# Altium PCB NetTroll.PcbDoc (part 2 of 2)
Units mm, origin at the board's own origin, x right, y up, seen from the top; angles counter-clockwise.
Board outline 65 x 60 mm, 2 copper layers (Top Layer, Bottom Layer); 90 components, 102 nets, 423 pads, 380 vias.
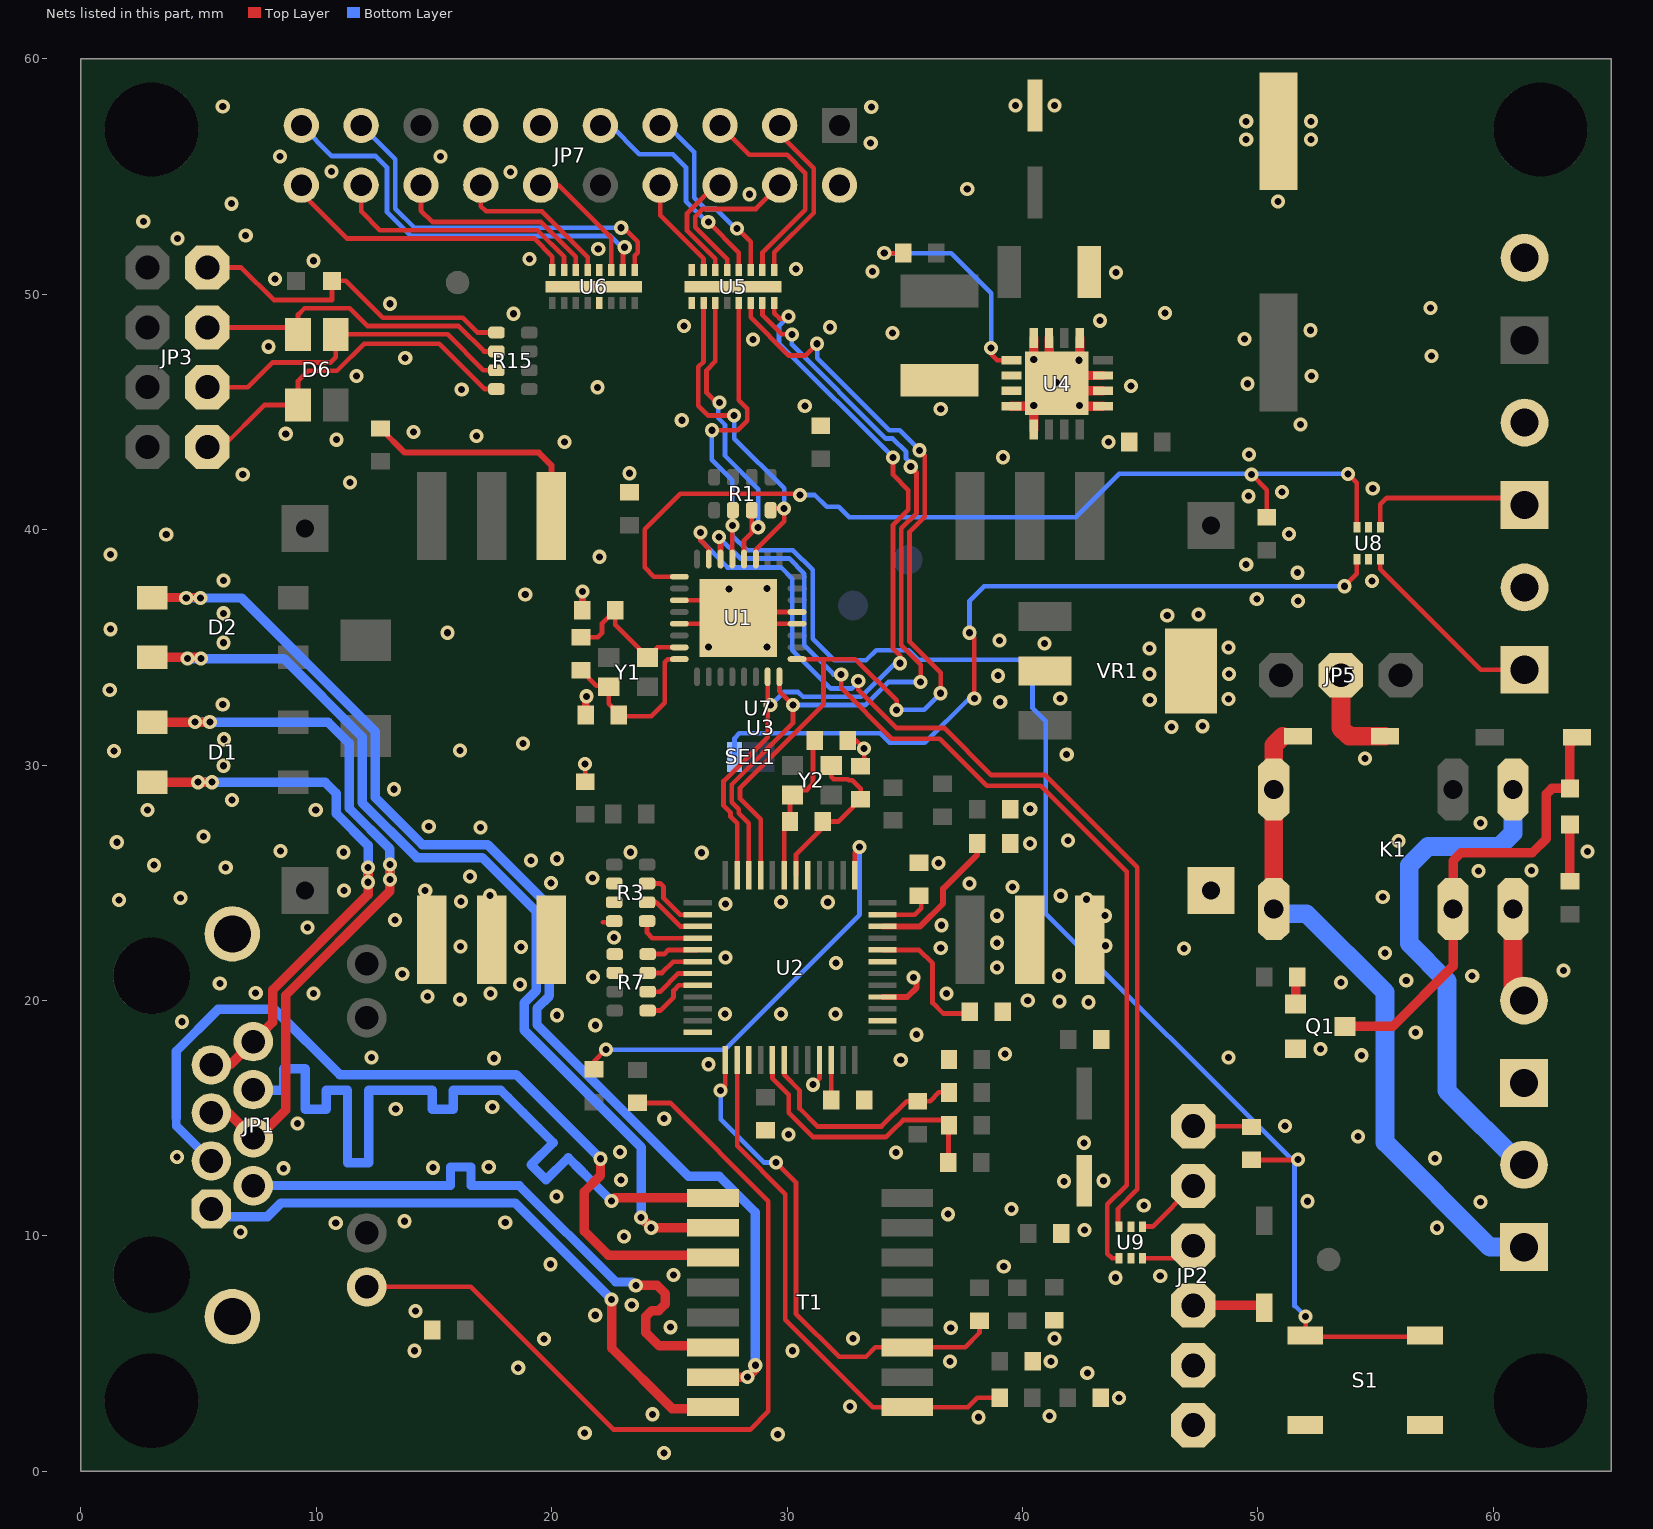
[diagram p2: the nets of this part, all layers, seen from the top]

## Via types
v1: diameter 0.6, hole 0.3, Top Layer to Bottom Layer, tented both sides, 380 vias

## Nets (pads, with @x,y where several pads share a name; then routed paths per layer and width w, separated by ;. In a path a pad name is that pad's centre, name@x,y a point inside that pad or via, vN(x,y) a via of type N, cw(c..) or ccw(c..) an arc to the next point about the centre after c; other vN are vias at no path point) (continued)
EP_LED_2: JP1.12 R14.1 | length 36.1
  Top Layer w0.2: JP1.12@12.14,7.84 16.56,7.84 22.625,1.775 28.425,1.775 29.203,2.553 29.203,11.472 25.025,15.65 R14.1@23.65,15.65
EP_PWR_A: D1.AC2 JP1.4 JP1.5 | length 32.2
  Top Layer w0.4: D1.AC2@3.025,31.82 v1@5.47,31.82 ; JP1.5@5.54,15.225 6.27,15.225 JP1.4@7.32,14.175 7.525,14.175 8.7,15.35 8.7,20.225 13.125,24.65 v1(13.125,25.15) v1(13.125,25.775)
  Bottom Layer w0.4: v1(4.85,31.825) v1(5.475,31.825) 10.5,31.825 11.4,30.925 11.4,28.169 13.125,26.444 v1(13.125,25.775) v1(13.125,25.15)
EP_PWR_B: D1.AC1 JP1.7 JP1.8 | length 24.6
  Top Layer w0.4: D1.AC1@3.025,29.28 v1@5.57,29.28 ; JP1.7@5.54,17.265 6.33,17.265 JP1.8@7.32,18.255 8.15,19.085 8.15,19.625 8.15,20.453 12.2,24.503 v1(12.2,25.025) v1(12.2,25.65)
  Bottom Layer w0.4: v1(4.975,29.275) v1(5.575,29.275) 10.375,29.275 10.85,28.8 10.85,27.942 12.2,26.592 v1(12.2,25.65) v1(12.2,25.025)
EP_RX_N: JP1.6 T1.9 | length 36
  Top Layer w0.4: v1(22.546,11.479) 22.687,11.62 T1.9@26.848,11.62
  Bottom Layer w0.4: JP1.6@7.32,16.215 7.32,16.19 8.175,16.19 8.625,16.19 8.625,17.11 9.525,17.11 9.525,16.19 9.525,15.39 10.425,15.39 10.425,16.19 11.325,16.19 11.325,13.112 12.225,13.112 12.225,16.19 13.125,16.19 14.025,16.19 14.925,16.19 14.925,15.39 15.825,15.39 15.825,16.19 16.725,16.19 17.625,16.19 17.835,16.19 18.153,15.872 18.79,15.235 19.426,14.599 20.062,13.963 19.122,13.022 19.758,12.385 20.699,13.326 21.263,12.763 21.381,12.644 ; 21.763,12.263 21.381,12.644 ; v1(22.546,11.479) 21.381,12.644
EP_RX_P: JP1.3 T1.11 | length 36
  Top Layer w0.4: v1(22.071,13.279) 22.071,12.566 21.38,11.875 21.38,10.208 22.408,9.18 26.748,9.18 T1.11@26.848,9.08
  Bottom Layer w0.381: 4.05,15 4.05,14.675 JP1.3@5.54,13.185
  Bottom Layer w0.4: 4.05,15 4.05,17.85 5.825,19.625 8.225,19.625 11,16.85 18.5,16.85 v1(22.071,13.279)
EP_RX_PWR: D2.AC2 T1.15 | length 51.6
  Top Layer w0.4: D2.AC2@3.025,37.12 v1@5.055,37.12 ; T1.15@26.848,4 v1@28.314,4 ; v1(28.318,4.004) v1@28.314,4 ; v1(28.647,4.509) 28.647,4.333 v1@28.314,4
  Bottom Layer w0.4: v1(4.475,37.1) v1(5.075,37.1) 6.825,37.1 12.5,31.425 12.5,28.625 14.5,26.625 17.272,26.625 19.9,23.997 19.9,20.197 19.375,19.672 19.375,18.975 25.809,12.541 27.116,12.541 28.647,11.01 28.647,4.333 v1(28.318,4.004) v1@28.305,4.017
EP_TX_N: JP1.2 T1.14 | length 26.3
  Top Layer w0.4: v1(23.571,7.904) 24.471,7.904 24.821,7.554 24.821,7.104 24.546,6.829 24.246,6.829 23.996,6.579 23.996,5.897 24.564,5.329 26.788,5.329 T1.14@26.848,5.27
  Bottom Layer w0.381: JP1.2@7.32,12.135 12.425,12.135 15.698,12.135 15.698,12.922 16.579,12.922 16.579,12.135 17.46,12.135 17.9,12.135 18.626,12.135 22.713,8.049 23.426,8.049 v1(23.571,7.904)
  Bottom Layer w0.4: JP1.2@7.32,12.135 JP1.2@7.35,12.105
EP_TX_P: JP1.1 T1.16 | length 26.5
  Top Layer w0.4: v1(22.546,7.304) 22.546,5.229 25.11,2.665 26.782,2.665 T1.16@26.848,2.73
  Bottom Layer w0.4: JP1.1@5.54,11.145 5.86,10.825 7.925,10.825 8.5,11.4 18.45,11.4 v1(22.546,7.304)
EP_TX_PWR: D2.AC1 T1.10 | length 42
  Top Layer w0.4: D2.AC1@3.025,34.58 v1@5.045,34.58 ; v1(23.796,10.779) v1(24.225,10.35) T1.10@26.848,10.35
  Bottom Layer w0.4: v1(4.525,34.525) v1(5.1,34.525) 8.622,34.525 11.95,31.197 11.95,28.397 14.272,26.075 17.044,26.075 19.35,23.769 19.35,20.425 18.825,19.9 18.825,18.747 23.796,13.776 v1(23.796,10.779) v1(24.225,10.35)
EXT_INT_SEL: SEL1.1 U8.1 | length 34
  Top Layer w0.2: v1@37.75,35.45 v1(37.75,35.625) 37.95,35.425 v1(37.95,32.825) ; v1(53.675,37.6) 54.2,38.125 U8.1@54.2,38.75
  Bottom Layer w0.2: SEL1.1@27.765,30.35 27.765,31.14 27.975,31.35 33.95,31.35 34.35,30.95 35.85,30.95 37.725,32.825 v1(37.95,32.825) ; v1(37.75,35.625) 37.75,36.984 38.366,37.6 v1(53.675,37.6)
F_D16: JP7.4 U5.5 | length 7.6
  Top Layer w0.2: U5.5@27.45,51.025 27.45,51.497 26.1,52.847 26.1,53.303 26.422,53.625 28.675,53.625 JP7.4@29.685,54.635 JP7.4@29.685,55.235
F_D17: JP7.12 U6.3 | length 5.3
  Top Layer w0.2: JP7.12@19.525,54.635 20.297,54.635 22.525,52.407 U6.3@22.525,51.025
F_LED1: JP7.20 U6.8 | length 12.7
  Top Layer w0.2: JP7.20@9.365,54.635 9.365,54.31 11.3,52.375 19.25,52.375 20.025,51.6 U6.8@20.025,51.025
F_LED2: JP7.18 U6.7 | length 11.1
  Top Layer w0.2: JP7.18@11.905,54.635 11.905,53.52 12.7,52.725 19.395,52.725 20.525,51.595 U6.7@20.525,51.025
F_LED3: JP7.16 U6.6 | length 9
  Top Layer w0.2: JP7.16@14.445,54.635 14.445,53.555 14.925,53.075 19.54,53.075 21.025,51.59 U6.6@21.025,51.025
F_LED4: JP7.14 U6.5 | length 6.9
  Top Layer w0.2: JP7.14@16.985,54.635 16.985,53.75 17.21,53.525 19.585,53.525 21.525,51.585 U6.5@21.525,51.025
F_MISO: JP7.5 U5.2 | length 9.3
  Top Layer w0.2: JP7.5@27.145,57.175 28.395,55.925 30,55.925 30.775,55.15 30.775,53.6 28.95,51.775 U5.2@28.95,51.025
F_MOSI: JP7.3 U5.1 | length 8
  Top Layer w0.2: U5.1@29.45,51.025 29.45,51.78 31.125,53.455 31.125,55.35 29.685,56.79 JP7.3@29.685,57.775
F_RST: JP7.9 U5.4 | length 9.7
  Top Layer w0.2: v1(26.65,53.075) 27.95,51.775 U5.4@27.95,51.025
  Bottom Layer w0.2: JP7.9@22.065,57.175 22.5,57.175 23.725,55.95 25.15,55.95 25.7,55.4 25.7,53.955 26.58,53.075 v1(26.65,53.075)
F_SCK: JP7.7 U5.3 | length 8.7
  Top Layer w0.2: v1(27.875,52.8) 28.45,52.225 U5.3@28.45,51.025
  Bottom Layer w0.2: JP7.7@24.605,57.775 24.605,57.49 26.05,56.045 26.05,54.1 26.525,53.625 26.975,53.625 27.8,52.8 v1(27.875,52.8)
F_SCL: JP7.6 U5.6 | length 4.8
  Top Layer w0.2: U5.6@26.95,51.025 26.95,51.502 25.75,52.702 25.75,53.448 26.937,54.635 JP7.6@27.145,54.635
F_SDA: JP7.8 U5.7 | length 5
  Top Layer w0.2: JP7.8@24.605,55.235 JP7.8@24.605,54.635 24.605,53.352 26.45,51.507 U5.7@26.45,51.025
F_SS_RX: JP7.19 U6.2 | length 18
  Top Layer w0.2: U6.2@23.025,51.025 23.025,51.925 v1(23.1,52)
  Bottom Layer w0.2: JP7.19@9.365,57.175 10.665,55.875 12.525,55.875 13,55.4 13,53.5 14.025,52.475 22.5,52.475 22.975,52 v1(23.1,52)
F_SS_TX: JP7.17 U6.1 | length 16.3
  Top Layer w0.2: v1(22.951,52.828) 23.05,52.828 23.65,52.228 23.65,51.772 23.525,51.647 U6.1@23.525,51.025
  Bottom Layer w0.2: JP7.17@11.905,57.175 13.35,55.73 13.35,53.645 14.17,52.825 22.949,52.825 v1(22.951,52.828)
GND: C1.1 C2.1 C3.1 C4.1 C5.1 C6.1 C7.1 C8.1 C9.- C10.1 C11.1 C12.1 C13.1 C16.1 C17.1 C18.1 C19.1 C21.1 C22.2 C23.1 C24.1 C25.- C26.- JP1.GND1 JP1.GND2 JP2.5 JP2.6 JP4.2 JP7.2 JP7.11 JP7.13 JP8.1 JP9.2 JP12.2 Q1.1 R3.2 R3.3 R3.4 R4.1 R5.1 R7.1 R7.2 S1.1 S1.2 U1.3 U1.5 U1.20 U1.21 U1.33 U2.3 U2.9 U2.14 U2.16 U2.19 U2.29 U2.48 U3.7 U3.8 U3.9 U3.11 U3.12 U4.0 U4.1 U4.5 U4.6 U4.7 U4.9 U4.11 U4.12 U4.16 U5.8 U5.9 U5.17 U6.4 U6.13 U6.17 U7.3 U8.2 U8.5 U9.2 U9.5 VR1.2 | length 25.2
  Top Layer w0.2: C2.1@21.292,36.579 C2.1@21.296,36.579 ; C18.1@21.421,29.304 v1(21.421,30.054) ; v1@21.446,32.896 v1(21.475,32.925) ; 22.171,23.329 R3.4@22.471,23.329 ; U1.5@25.421,36.004 U1.33@26.721,36.004 ; U1.3@25.421,37.004 U1.33@27.171,37.004 ; U1.33@29.121,36.004 U1.20@30.421,36.004 ; U1.33@29.121,36.504 U1.21@30.421,36.504 ; v1(31.1,16.425) 31.375,16.7 U2.9@31.375,17.475 ; C12.1@32.571,31.054 32.921,31.054 v1(33.271,30.704) 33.271,30.104 C13.1@33.121,29.954 ; U4.0@40.471,46.404 U4.0@40.471,47.354 ; U4.0@41.121,45.754 U4.0@41.121,47.354 ; U4.0@41.771,45.104 U4.0@42.425,45.104 ; U4.0@41.771,45.754 U4.0@41.775,45.754
  Top Layer w0.25: U2.16@34.05,20.15 35.1,20.15 35.5,20.55 35.5,20.85 v1(35.375,20.975)
  Top Layer w0.3: C2.1@21.296,36.579 21.3,36.583 v1(21.3,37.375) ; C1.1@21.446,32.129 v1@21.446,32.896
  Top Layer w0.4: U4.16@39.525,45.25 40.475,45.25 U4.1@40.475,44.25 ; U4.0@40.475,47.358 U4.12@40.475,48.15 ; U4.0@41.125,47.358 U4.11@41.125,48.15 ; U4.0@41.775,45.9 U4.6@43.425,45.9 ; U4.0@41.775,46.55 U4.7@43.425,46.55 ; U4.0@42.425,45.25 U4.5@43.425,45.25 ; U4.0@42.425,47.2 U4.9@42.425,48.15
  other v1: 24.775,0.775 29.6,1.575 21.4,1.625 38.125,2.3 41.15,2.35 24.275,2.425 32.675,2.75 44.1,3.125 42.75,4.175 18.575,4.4 36.925,4.675 41.2,4.675 14.175,5.125 30.225,5.125 19.675,5.625 32.8,5.65 41.35,5.65 36.95,6.1 25.05,6.125 21.849,6.631 14.214,6.81 23.399,7.07 43.95,8.225 45.85,8.3 25.175,8.35 39.2,8.7 19.95,8.8 23.075,9.975 6.775,10.175 42.625,10.25 57.6,10.35 10.825,10.55 18.025,10.575 13.75,10.625 36.825,10.925 39.525,11.15 45.15,11.3 59.45,11.45 52.1,11.475 20.2,11.675 41.763,12.322 43.44,12.346 22.94,12.372 8.6,12.875 14.95,12.9 17.325,12.925 57.525,13.3 4.075,13.35 34.625,13.55 22.896,13.57 42.616,13.958 54.25,14.225 30.053,14.303 51.15,14.675 9.2,14.775 24.777,14.982 13.375,15.4 17.475,15.475 26.66,17.293 34.825,17.475 17.55,17.55 12.35,17.575 48.75,17.575 54.4,17.675 39.256,17.726 52.65,17.95 35.5,18.55 56.7,18.65 21.85,18.95 4.3,19.1 20.225,19.375 29.731,19.422 32.049,19.422 27.368,19.434 42.796,19.929 41.571,19.954 40.221,20.004 16.1,20.05 14.725,20.175 9.875,20.3 17.4,20.3 36.775,20.3 7.425,20.325 18.646,20.679 5.9,20.725 53.525,20.775 56.3,20.85 21.75,21 59.1,21.05 41.546,21.054 13.65,21.125 62.975,21.275 38.921,21.404 32.076,21.593 27.38,21.829 55.4,22.025 46.852,22.216 36.525,22.225 18.696,22.279 16.121,22.304 43.521,22.329 38.921,22.454 22.65,22.675 9.625,23.1 36.55,23.2 13.35,23.425 38.921,23.604 43.496,23.604 27.383,24.101 29.743,24.183 31.724,24.176 16.146,24.204 1.625,24.275 42.721,24.304 4.225,24.35 55.3,24.4 17.371,24.454 41.621,24.454 11.175,24.675 14.625,24.675 39.571,24.829 37.75,24.975 19.975,25 21.725,25.2 16.525,25.275 59.375,25.5 61.625,25.525 6.15,25.65 3.1,25.75 36.425,25.85 19.125,25.95 20.225,26.025 26.371,26.279 11.15,26.3 23.35,26.3 64,26.325 8.475,26.35 40.313,26.679 1.525,26.725 55.975,26.775 41.925,26.8 5.2,26.975 16.975,27.35 14.775,27.4 59.45,27.55 2.825,28.1 9.975,28.1 40.325,28.13 6.425,28.525 13.3,28.975 6.05,29.975 54.55,30.275 41.875,30.45 1.4,30.6 16.1,30.625 18.775,30.925 6.075,31.1 46.325,31.625 47.646,31.654 6.025,32.575 39.05,32.675 45.405,32.764 41.6,32.825 48.75,32.815 1.225,33.2 38.95,33.8 45.392,33.868 48.763,33.868 45.4,34.95 48.756,34.991 26.65,35.025 29.15,35.025 40.925,35.175 6.05,35.2 39.025,35.3 15.575,35.625 1.25,35.775 46.146,36.354 47.475,36.4 6.05,36.45 51.7,36.975 49.95,37.05 18.875,37.25 27.525,37.475 29.15,37.5 54.85,37.825 6.05,37.85 51.675,38.175 49.5,38.525 22.025,38.85 1.25,38.95 3.625,39.8 51.325,39.825 49.6,41.425 51.025,41.6 54.875,41.75 11.425,42 6.875,42.35 23.3,42.4 39.171,43.079 49.625,43.2 20.55,43.725 43.651,43.719 10.85,43.825 16.8,43.975 8.7,44.075 14.125,44.15 51.8,44.475 25.525,44.65 36.525,45.125 30.75,45.25 40.475,45.275 42.425,45.275 16.175,45.95 21.95,46.05 44.6,46.1 49.55,46.2 41.45,46.25 11.7,46.525 52.275,46.525 42.4,47.2 40.475,47.225 13.775,47.3 57.375,47.375 7.975,47.775 28.55,48.075 49.425,48.1 34.475,48.35 52.225,48.475 31.825,48.6 25.625,48.65 43.296,48.879 18.375,49.175 46.046,49.204 57.325,49.425 13.125,49.6 8.25,50.65 43.975,50.925 33.625,50.975 30.375,51.075 9.875,51.425 19.05,51.5 21.975,51.925 4.1,52.375 7,52.5 2.65,53.1 6.4,53.85 50.85,53.95 28.4,54.25 37.65,54.475 18.25,55.2 10.65,55.225 8.45,55.85 15.275,55.85 33.55,56.425 49.5,56.575 52.25,56.575 49.5,57.35 52.25,57.35 33.575,57.95 6.025,57.975 39.7,58.025 41.35,58.025
INT1/D3: R21.2 U1.1 U8.6 | length 39.5
  Top Layer w0.2: U1.1@25.421,38.004 24.343,38.004 23.95,38.397 23.95,40.025 25.454,41.529 30.496,41.529 v1(30.55,41.475) ; v1(49.725,42.35) 50.375,41.7 R21.2@50.375,40.525 ; v1(53.825,42.375) 54.2,42 U8.6@54.2,40.1
  Bottom Layer w0.2: v1(30.55,41.475) 31.177,41.475 31.677,40.975 32.197,40.975 32.625,40.547 32.625,40.529 42.254,40.529 44.1,42.375 v1(53.825,42.375)
LINK-LED: R13.2 U2.25 | length 18.1
  Top Layer w0.2: R13.2@21.8,17.075 21.8,17.427 v1(22.299,17.926) ; U2.25@32.875,25.325 32.875,26.3
  Bottom Layer w0.2: v1(22.299,17.926) 22.309,17.916 27.341,17.916 33.075,23.65 v1(33.075,26.528)
MISO: U1.16 U2.34 U5.15 | length 35.7
  Top Layer w0.2: U2.34@28.375,25.325 28.375,27.53 27.946,27.959 27.946,28.127 27.65,28.423 27.65,29.178 30.246,31.774 v1@30.246,32.51 ; U5.15@28.95,49.625 28.95,49.125 29.775,48.3 v1(30.2,48.3) ; U1.16@29.671,33.754 29.671,33.148 30.246,32.573 v1@30.246,32.51 ; v1(30.246,32.554) v1@30.246,32.51 ; v1(35.251,42.677) 35.496,42.433 35.496,40.706 34.85,40.06 34.85,35.091 35.671,34.27 v1(35.671,33.529)
  Bottom Layer w0.2: v1(30.2,48.3) 30.2,47.87 34.195,43.875 34.478,43.875 35.05,43.303 35.05,43.02 35.251,42.818 v1(35.251,42.677) ; v1(30.246,32.554) 33.321,32.554 34.296,33.529 v1(35.671,33.529)
MOSI: U1.15 U2.35 U5.16 | length 34.8
  Top Layer w0.2: U2.35@27.875,25.325 27.875,27.525 27.596,27.804 27.596,27.982 27.3,28.278 27.3,29.323 29.171,31.194 U1.15@29.171,33.754 ; v1@29.196,32.554 29.371,32.554 29.367,32.55 v1(29.3,32.55) ; U5.16@29.45,49.625 29.45,49.2 29.675,48.975 30.05,48.975 30.051,48.976 v1(30.051,49.052) ; v1(34.5,43.075) 34.5,42.332 35.146,41.686 35.146,40.851 34.5,40.205 34.5,34.946 34.796,34.65 v1(34.796,34.329)
  Bottom Layer w0.2: v1(29.3,32.55) 29.854,33.104 30.474,33.104 30.674,32.904 33.146,32.904 33.85,33.608 33.88,33.608 34.601,34.329 v1(34.796,34.329) ; v1(30.051,49.052) 29.65,48.651 29.65,47.925 v1(34.5,43.075)
NetC1_2: C1.2 R2.1 U1.8 Y1.1 | length 7.4
  Top Layer w0.2: R2.1@21.246,34.029 21.896,33.379 22.371,33.379 Y1.1@22.421,33.329 22.421,32.604 22.946,32.079 24.221,32.079 24.796,32.654 24.796,34.377 24.923,34.504 U1.8@25.421,34.504
NetC2_2: C2.2 R2.2 U1.7 Y1.3 | length 6.3
  Top Layer w0.2: R2.2@21.246,35.429 21.964,35.429 22.132,35.597 22.132,36.015 C2.2@22.696,36.579 22.696,35.954 Y1.3@24.071,34.579 24.496,35.004 U1.7@25.421,35.004
NetC10_2: C10.2 U2.20 | length 5.8
  Top Layer w0.2: U2.20@34.05,22.15 35.6,22.15 36.175,21.575 36.175,19.9 36.625,19.45 C10.2@37.75,19.45
NetC11_2: C11.2 U2.22 | length 6.1
  Top Layer w0.254: U2.22@34.05,23.15 35.65,23.15 36.625,24.125 36.625,24.75 38.075,26.2 C11.2@38.075,26.675
NetC20_1: C20.1 JP2.1 | length 2.5
  Top Layer w0.2: JP2.1@47.251,14.664 49.586,14.664 C20.1@49.721,14.529
NetD3_1: D3.1 R22.1 | length 2.4
  Top Layer w0.4: R22.1@63.25,25.075 D3.1@63.25,27.488
NetD3_2: D3.2 D9.A K1.9 Q1.3 | length 19.8
  Top Layer w0.4: Q1.3@53.7,18.9 55.725,18.9 58.29,21.465 K1.9@58.29,23.885 58.29,25.94 58.625,26.275 61.65,26.275 62.25,26.875 62.25,28.774 62.488,29.012 D3.2@63.25,29.012 63.25,30.875 D9.A@63.55,31.175
NetD4_1: D4.A JP2.4 | length 3
  Top Layer w0.4: JP2.4@47.261,7.054 D4.A@50.275,7.054
NetD7_1: D7.A JP5.2 | length 4.3
  Top Layer w0.8: JP5.2@53.52,33.82 53.525,31.575 53.875,31.225 D7.A@55.4,31.225
NetD7_2: D7.K JP6.1 K1.5 K1.6 | length 27.8
  Top Layer w0.8: K1.6@50.67,23.885 K1.5@50.67,28.965 50.67,30.845 51.05,31.225
  Bottom Layer w0.8: K1.6@50.67,23.885 50.866,23.689 52.061,23.689 55.4,20.35 55.4,13.975 59.85,9.525 JP6.1@61.3,9.525
NetJP2_2: JP2.2 U9.1 | length 2.9
  Top Layer w0.2: U9.1@45.1,10.4 45.527,10.4 JP2.2@47.251,12.124
NetJP2_3: JP2.3 U9.6 | length 2.4
  Top Layer w0.2: U9.6@45.1,9.05 46.717,9.05 JP2.3@47.251,9.584
NetJP6_2: JP6.2 K1.1 | length 21.6
  Bottom Layer w0.8: K1.1@60.83,28.965 60.83,27.105 60.275,26.55 57.225,26.55 56.425,25.75 56.425,22.425 58.025,20.825 58.025,16.175 61.175,13.025 JP6.2@61.3,13.025
NetJP8_2: JP8.2 K1.10 | length 4.1
  Top Layer w0.8: K1.10@60.83,23.885 60.83,20.47 JP8.2@61.3,20
NetJP9_1: JP9.1 U8.3 | length 8.3
  Top Layer w0.2: U8.3@55.2,38.75 55.2,38.317 59.467,34.05 JP9.1@61.325,34.05
NetJP12_1: JP12.1 U8.4 | length 7.3
  Top Layer w0.2: U8.4@55.2,40.1 55.2,41.075 55.475,41.35 61.025,41.35 JP12.1@61.325,41.05
NetL1_1: L1.1 U4.14 U4.15
NetQ1_2: Q1.2 R23.1 | length 1.2
  Top Layer w0.4: Q1.2@51.6,19.85 51.6,20.925 R23.1@51.675,21
NetR3_5: R3.5 U2.40 | length 2.7
  Top Layer w0.2: R3.5@24.05,23.375 24.05,22.875 24.275,22.65 U2.40@26.2,22.65
NetR3_6: R3.6 U2.39 | length 2.6
  Top Layer w0.2: R3.6@24.05,24.175 24.43,24.175 25.455,23.15 U2.39@26.2,23.15
NetR3_7: R3.7 U2.38 | length 3
  Top Layer w0.2: R3.7@24.05,24.975 24.6,24.975 24.75,24.825 24.75,24.35 25.45,23.65 U2.38@26.2,23.65
NetR4_2: R4.2 U2.10 | length 1.8
  Top Layer w0.2: R4.2@31.875,15.725 U2.10@31.875,17.475
NetR5_2: R5.2 U2.23 | length 2.4
  Top Layer w0.2: U2.23@34.05,23.65 35.425,23.65 35.7,23.925 R5.2@35.7,24.525
NetR7_5: R7.5 U2.44 | length 2.7
  Top Layer w0.2: R7.5@24.075,19.575 24.6,19.575 25.175,20.15 25.175,20.425 25.4,20.65 U2.44@26.2,20.65
NetR7_6: R7.6 U2.43 | length 2.4
  Top Layer w0.2: R7.6@24.075,20.375 24.6,20.375 25.375,21.15 U2.43@26.2,21.15
NetR7_7: R7.7 U2.42 | length 2.3
  Top Layer w0.2: R7.7@24.075,21.175 24.68,21.175 25.155,21.65 U2.42@26.2,21.65
NetR7_8: R7.8 U2.41 | length 2.2
  Top Layer w0.2: R7.8@24.075,21.975 24.775,21.975 24.95,22.15 U2.41@26.2,22.15
NetR18_2: R18.2 U3.4 | length 10.1
  Top Layer w0.254: R18.2@12.725,44.3 13.75,43.275 19.45,43.275 19.986,42.739 U3.4@19.986,40.579
NetR20_1: R20.1 U4.13 | length 9.6
  Top Layer w0.2: v1(34.125,51.75) R20.1@34.925,51.75 R20.1@34.95,51.775 ; v1(38.667,47.725) 38.667,47.45 38.917,47.2 U4.13@39.525,47.2
  Bottom Layer w0.2: v1(34.125,51.75) 36.967,51.75 38.667,50.05 v1(38.667,47.725)
OUT1_R: D5.2 JP3.2 R15.1 | length 14.6
  Top Layer w0.2: JP3.2@5.37,51.135 6.815,51.135 8.188,49.762 10.662,49.762 D5.2@10.662,50.575 11.25,50.575 12.825,49 16.225,49 16.85,48.375 R15.1@17.65,48.375
OUT2_R: D6.4 JP3.4 R15.2 | length 13.7
  Top Layer w0.2: JP3.4@5.37,48.595 D6.4@8.93,48.595 ; D6.4@9.225,48.3 9.225,49.139 9.498,49.412 11.413,49.412 12.175,48.65 16.05,48.65 17.125,47.575 R15.2@17.65,47.575
OUT3_R: D6.3 JP3.6 R15.3 | length 14.4
  Top Layer w0.2: JP3.6@5.37,46.055 7.08,46.055 8.125,47.1 10.6,47.1 10.825,47.325 D6.3@10.825,48.3 15.575,48.3 17.1,46.775 R15.3@17.65,46.775
OUT4_R: D6.1 JP3.8 R15.4 | length 15.5
  Top Layer w0.2: JP3.8@5.37,43.515 6.015,43.515 7.8,45.3 D6.1@9.225,45.3 9.225,46.325 9.65,46.75 10.879,46.75 12.029,47.9 15.225,47.9 16.4,46.725 17.15,45.975 R15.4@17.65,45.975
RST: C20.2 R1.6 S1.3 S1.4 U1.29 U5.13 | length 71.5
  Top Layer w0.2: v1(26.801,44.227) 27.905,44.227 28.303,44.625 28.303,45.147 27.95,45.5 U5.13@27.95,49.625 ; U1.29@27.671,38.754 v1(27.671,40.179) 27.671,40.804 R1.6@27.696,40.829 ; C20.2@49.721,13.229 51.679,13.229 v1(51.7,13.25) ; v1(52.025,6.575) 52.025,5.765 52.263,5.527 52.46,5.725 S1.3@57.165,5.725
  Bottom Layer w0.2: v1(26.801,44.227) 26.801,42.974 27.671,42.104 v1(27.671,40.179) 27.671,39.754 28.296,39.129 30.246,39.129 31.083,38.292 31.083,35.367 32,34.45 33.35,34.45 33.779,34.879 35.171,34.879 35.577,34.473 39.835,34.473 40.425,33.883 40.425,32.425 40.979,31.871 40.979,23.696 51.425,13.25 v1(51.7,13.25) 51.55,13.1 51.55,7.025 51.575,7.025 v1(52.025,6.575)
RX_N: C14.2 R8.1 U2.5 | length 11.7
  Top Layer w0.2: U2.5@29.375,17.475 29.375,16.704 30.071,16.008 30.071,15.229 31.1,14.2 34.192,14.2 34.442,14.45 34.45,14.45 34.925,14.925 36.6,14.925 36.85,14.675 C14.2@36.85,13.125
RX_P: C15.2 R9.2 U2.6 | length 9.6
  Top Layer w0.2: U2.6@29.875,17.475 29.875,16.846 30.525,16.196 30.525,15.417 31.288,14.654 34.004,14.654 35.075,15.725 C15.2@35.55,15.725 36.075,15.725 36.45,16.1 R9.2@36.875,16.1
SCK: U1.17 U2.33 U5.14 | length 40.7
  Top Layer w0.2: U5.14@28.45,49.625 28.45,49.025 30.075,47.4 30.775,47.4 v1(31.275,47.9) ; U2.33@28.875,25.325 28.875,27.693 28,28.568 28,29.033 31.546,32.579 31.546,34.404 31.446,34.504 ; U1.17@30.421,34.504 31.446,34.504 ; v1(34.65,32.35) 34.65,32.75 32.896,34.504 31.446,34.504 ; v1(35.625,43.375) 35.846,43.154 35.846,40.561 35.2,39.915 35.2,35.236 36.521,33.915 v1(36.521,33.054)
  Bottom Layer w0.2: v1(31.275,47.9) 31.275,47.29 34.34,44.225 34.775,44.225 v1(35.625,43.375) ; v1(34.65,32.35) 35.817,32.35 v1(36.521,33.054)
SCL: R1.7 U1.28 U5.11 | length 13.4
  Top Layer w0.2: U5.11@26.95,49.625 26.95,47.15 26.575,46.775 26.575,45.825 27.125,45.275 27.126,45.276 v1(27.126,45.402) ; U1.28@28.171,38.754 28.171,39.554 28.496,39.879 v1@28.496,40.104 ; R1.7@28.496,40.829 v1@28.496,40.104 ; v1(28.771,40.104) v1@28.496,40.104
  Bottom Layer w0.2: v1(27.126,45.402) 27.076,45.352 27.076,44.746 27.36,44.462 27.36,43.14 28.771,41.729 v1(28.771,40.104)
SDA: R1.8 U1.27 U5.10 | length 14.2
  Top Layer w0.2: U5.10@26.45,49.625 26.45,47.145 26.225,46.92 26.225,45.272 26.647,44.85 v1(27.75,44.85) ; U1.27@28.671,38.754 28.671,39.154 29.873,40.356 v1(29.873,40.906) 29.373,40.906 R1.8@29.296,40.829
  Bottom Layer w0.2: v1(27.75,44.85) 27.75,43.875 29.873,41.752 v1(29.873,40.906)
TX_N: R11.1 T1.3 U2.1 | length 22
  Top Layer w0.2: v1(27.175,16.175) 27.375,16.375 U2.1@27.375,17.475 ; v1@29.521,13.129 30.375,12.275 30.375,6.704 32.204,4.875 33.35,4.875 33.745,5.27 T1.3@35.103,5.27 37.557,5.27 38.171,5.884 R11.1@38.171,6.404
  Bottom Layer w0.2: v1(27.175,16.175) 27.175,14.95 29,13.125 v1(29.525,13.125)
TX_P: R12.1 T1.1 U2.2 | length 22.7
  Top Layer w0.2: U2.2@27.875,17.475 27.875,13.825 29.921,11.779 29.921,6.44 33.631,2.73 T1.1@35.103,2.73 37.68,2.73 38.079,3.129 R12.1@39.021,3.129
XD1_N: U1.30 U9.4 | length 43.4
  Top Layer w0.2: v1(32.296,33.854) 32.296,33.279 34.45,31.125 36.477,31.125 38.477,29.125 40.775,29.125 44.421,25.479 44.421,12.163 43.6,11.342 43.6,9.25 43.8,9.05 U9.4@44.1,9.05
  Top Layer w0.254: v1(27.1,39.689) 27.171,39.618 U1.30@27.171,38.754
  Bottom Layer w0.2: v1(27.1,39.689) 28.01,38.779 30.081,38.779 30.729,38.131 30.729,35.096 31.971,33.854 v1(32.296,33.854)
XD1_P: U1.31 U9.3 | length 43.9
  Top Layer w0.2: v1(26.321,39.879) 26.321,39.543 26.671,39.193 U1.31@26.671,38.754 ; v1(33.021,33.579) 33.021,33.196 34.638,31.579 36.665,31.579 38.665,29.579 40.963,29.579 44.875,25.667 44.875,11.975 44.054,11.154 44.054,10.5 U9.3@44.154,10.4
  Bottom Layer w0.2: v1(26.321,39.879) 26.321,39.543 27.468,38.396 29.746,38.396 30.221,37.921 30.221,34.886 31.853,33.254 32.746,33.254 32.85,33.358 32.85,33.425 v1@33.021,33.596
XI_ETH: C13.2 R6.2 U2.30 Y2.3 | length 7.1
  Top Layer w0.2: U2.30@30.375,25.325 30.375,26.203 31.521,27.349 R6.2@31.521,27.604 32.171,27.604 C13.2@33.121,28.554 33.121,29.004 32.771,29.354 32.617,29.354 32.567,29.404 31.971,29.404 31.871,29.504 Y2.3@31.871,29.979
XO_ETH: C12.2 R6.1 U2.31 Y2.1 | length 6.4
  Top Layer w0.2: U2.31@29.875,25.325 29.875,27.358 R6.1@30.121,27.604 30.121,28.629 Y2.1@30.221,28.729 30.44,28.948 30.84,28.948 31.096,29.204 C12.2@31.096,30.979
pads on no net: FD1.0 FD2.0 JP1. T1.4 T1.5 T1.12 T1.13 U2.7 U2.12 U2.13 U2.18 U2.24 U2.26 U2.45 U2.46 U2.47 U3.10 Y1.2 Y1.4 Y2.2 Y2.4

## Polygon pours and split planes (outlines as drawn)
GND on Bottom Layer "Top Layer-No Net" (solid, remove dead copper, pour order 15): 0,60 65,60 65,0 0,0
CGND on Top Layer "Top Layer-No Net" (solid, remove dead copper, pour order 9): 9.061,29.975 12.125,29.4 15,29.975 15,36 19.175,38 19.175,43.127 18.779,43.675 11.798,43.675 11.798,41.4 11.425,41.175 10.487,41.009 9.446,39.876 9.125,38.952
GND on Top Layer "Top Layer-No Net" (solid, remove dead copper, pour order 13): 0,60 65,60 65,0 0,0
5V on Top Layer "Top Layer-No Net" (solid, remove dead copper, pour order 10): 35.975,49.3 40.361,49.3 40.694,49.736 41.775,51.152 41.775,56 38.843,56 38.844,55.183 38.844,53.222 36.474,53.222 35.975,52.568

## Keep-outs
Keep-Out Layer:
  the board outline again, w0.5

## Other copper
Top Layer:
  rectangle net GND: 39.9,43.375 40.65,44.2
  rectangle net GND: 43.425,44.625 44.25,46.725
  rectangle net GND: 41.65,12 43.625,12.85
  rectangle net GND: 50.375,53.325 51.35,54.675
  rectangle net GND: 42.25,10.7 43,14.125
  rectangle net GND: 39.525,57.275 41.825,58.65
  rectangle net CGND: 9.08,30.775 10.075,32.701
  rectangle net CGND: 9.118,36.025 10.2,38.001
  rectangle net CGND: 10.55,30 13.6,32.6
  rectangle net GND: 31.431,53.411 33.396,55.95
  rectangle net GND: 15.85,55.975 20.275,58.19
  rectangle net GND: 45.425,0.525 49.9,5.825
  rectangle net GND: 25.15,50.075 30.375,50.575
  rectangle net GND: 19.2,50.075 24.35,50.575
  rectangle net GND: 57.5,50.823 62.8,52.45
  rectangle net GND: 42.325,50.125 43.9,51.8
  rectangle net GND: 57.475,36.875 63.2,38.377
  rectangle net GND: 57.625,43.773 62.925,45.4
  rectangle net 5V: 39.575,53.525 41.45,55.125
  rectangle net 5V: 38.6,49.925 40.65,51.95
  rectangle net 5V: 37.85,49.596 38.625,50.823
  rectangle net 5V: 35.975,50.35 37.7,52.575
  rectangle net GND: 42.25,48.15 43.296,48.879
  rectangle net GND: 39.875,48.15 41.3,48.925
  rectangle net GND: 38.65,43.45 39.65,45.425
  rectangle net NetL1_1: 37.575,45.763 39.475,46.7
  rectangle net CGND: 16.35,39.3 18.55,41.8
  rectangle net GND: 13.146,21.129 20.796,23.904
  rectangle net GND: 46.046,31.654 47.646,36.254
  rectangle net GND: 45.346,32.454 48.771,35.279
  rectangle net GND: 39.021,20.679 43.796,24.004
  rectangle net GND: 39.746,20.029 40.796,24.95
  rectangle net GND: 42.246,19.779 43.371,24.9
  rectangle net GND: 14.446,20.25 15.321,24.929
  rectangle net GND: 16.896,19.975 17.871,25.004
  rectangle net GND: 19.471,20.054 20.471,24.979
  rectangle net 12V: 37.125,38.35 49.025,42.004
  rectangle net 12V: 40.95,41.779 42.6,44.25
  rectangle net GND: 49.175,56.075 52.325,57.85
  rectangle net GND: 59.325,15.75 63.075,17.05
  rectangle net GND: 46.35,22.975 49.5,26.325
  rectangle net GND: 4.95,5.1 8.025,8.075
  rectangle net GND: 4.925,21.075 7.95,24.525
  rectangle net 12V: 45.5,41.775 49.025,47.179
  rectangle net GND: 43.7,43.325 45.175,44.125
  pour cut-out: 19.175,38.504 19.175,26.4 38.5,26.4 38.5,38.504
  pour cut-out: 12.3,44.85 12.3,41.875 12.275,41.9 12.275,41.45 11.8,41.475 11.8,43.9 11.825,43.925 12.125,44.85
Bottom Layer:
  rectangle net GND: 59.675,15.75 63.25,17.075
  rectangle net GND: 30.775,53.45 33.625,55.825
  rectangle net GND: 15.875,56 20.7,58.6
  rectangle net GND: 45.8,0.5 49.1,5.85
  rectangle net GND: 57.025,50.723 63.125,52.35
  rectangle net GND: 57.2,43.573 63.3,45.2
  rectangle net GND: 57.4,36.775 62.875,38.346
  rectangle net GND: 46.625,23.225 49.375,26.45
  rectangle net GND: 4.975,4.975 8.025,8.075
  rectangle net GND: 4.95,21.25 7.925,24.257

## Silkscreen, mask and mechanical layers (free items; w line width, h text height)
Top Overlay:
  lines w0.254: 55.463,44.663 55.65,44.85 57.1,46.3 56.575,46.3 57.15,45.725 57.15,46.25
  text "RX TX + -" at 8.225,58.475 h1
  text "- RS CL SPI  +" at 19.025,58.475 h1
  text "12V-" at 59.1,54.2 h0.9 r90
  text "LED/PWM  D" at 10.25,52.05 h1
  text "+  I2C  D -" at 21.7,52.05 h1
  text "12v+" at 55.4,41.125 h1 r90
  text "+LED-" at 1.85,40.5 h1
  text "VOLTAGE" at 49.15,36.925 h1
  text "0 INT 1" at 57.4,35.6 h1 r90
  text "SELECT" at 49.6,35.425 h1
  text "5V" at 48.85,31.05 h1
  text "12V" at 56.325,30.85 h1
  text "NO" at 57.15,18.975 h1 r90
  text "GND" at 57.2,15 h1 r90
  text "NC" at 57.2,12.175 h1 r90
  text "RELAY OUT" at 55.575,10.15 h1 r90
  text "INJECTION" at 16.425,9.7 h1 r90
  text "POE or 48V" at 14.8,9.025 h1 r90
  text "COM" at 57.225,8.375 h1 r90
  text "Netrol" at 7.925,4.025 h1
  text "V1.4" at 7.925,2.3 h1
  text "GND" at 50.175,2.025 h1 r90
  text "PROGRAM" at 45.425,1.525 h1 r90
Bottom Overlay:
  lines w0.254: 46.665,52.724 46.665,53.359 47.554,53.613 47.777,54.253 47.363,54.933 47.856,55.426 48.554,54.979 49.205,55.243 49.332,56.021 50.094,56.026 50.221,55.259 50.856,55.01 51.613,55.523 52.126,55.01 51.618,54.375 51.872,53.613 52.761,53.359 52.761,52.724 51.999,52.597 51.669,51.819 52.06,51.205 51.618,50.692 50.919,51.134 50.602,50.946 50.175,52.175 ccw(c49.739,53.038) 49.23,52.216 48.824,50.946 48.443,51.073 47.808,50.702 47.3,51.2 47.808,51.835 47.427,52.597 46.665,52.724
  text "12V AUX" at 59.375,53.05 h0.9 r90
  text "GND  +" at 63.925,52.4 h0.9 r90
  text "open hardware" at 56.75,47.375 h2
  text "INNTERRUPT PINS" at 59.375,45.75 h0.9 r90
  text "GND  1" at 63.95,45.525 h0.9 r90
  text "designed by" at 56.425,44.3 h2
  text "Luke Hovington" at 56.35,42.475 h2
  text "GND  0" at 63.85,38.65 h0.9 r90
  text "INT 0" at 30.15,33.575 h1
  text "SELECT" at 30.825,32.025 h1
  text "ETH" at 26.425,29.825 h1
  text "EXT" at 33.125,29.825 h1
  text "Netrol" at 17.25,3.525 h1
  text "V1.4" at 17.25,1.875 h1

## Text inside footprints (layer, text, board x,y; h text height)
U7: Mechanical 1 "IN" at 10.285,31.282 h1.52 r90; Mechanical 1 "OUT" at 48.639,30.52 h1.52 r90